# Altium PCB 线.pcbdoc
Units mil, origin at the board's own origin, x right, y up, seen from the top; angles counter-clockwise.
Board outline 1529 x 3542.1 mil, 2 copper layers (Top Layer, Bottom Layer); 6 components, 5 nets, 6 pads, 0 vias.
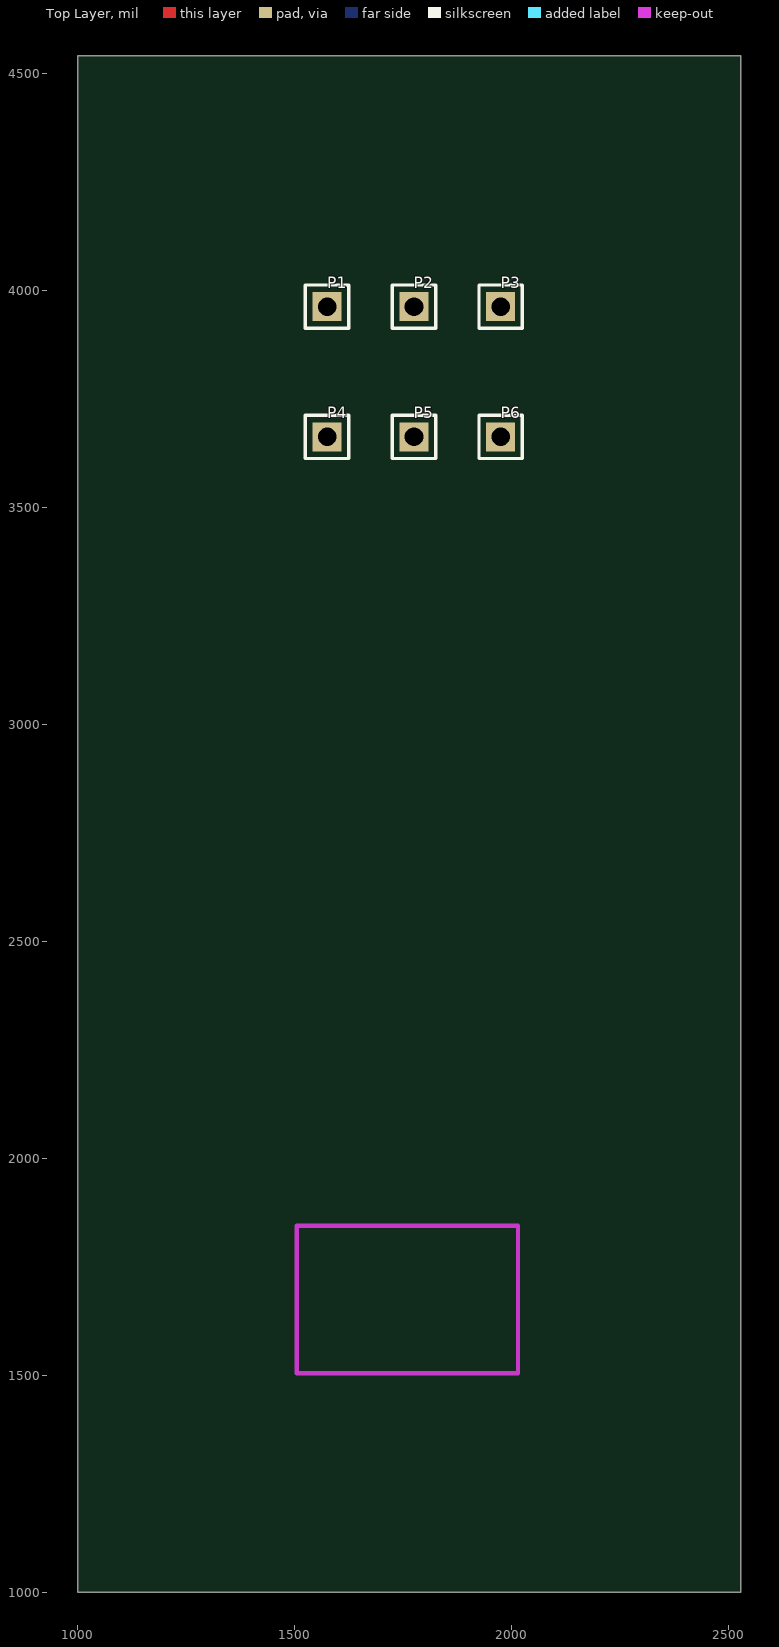
[diagram p0: Top Layer view]
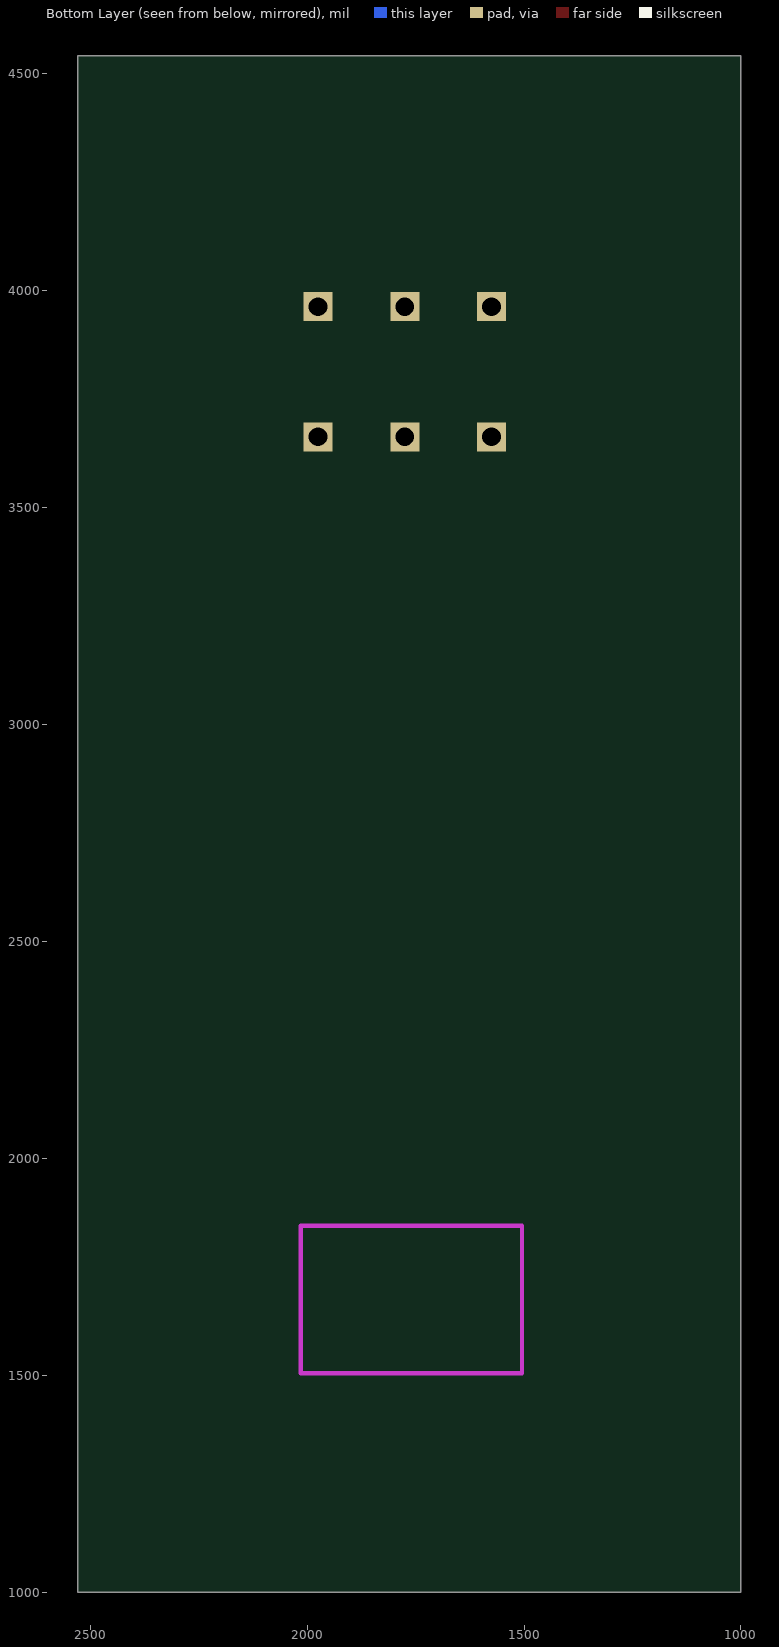
[diagram p1: Bottom Layer view, seen from below]

## Layer stack, top to bottom
Top Solder: solder mask 0.4, Solder Resist, Dk 3.5
Top Layer: signal copper 1.4
Dielectric1: dielectric 12.6, FR-4, Dk 4.8
Bottom Layer: signal copper 1.4
Bottom Solder: solder mask 0.4, Solder Resist, Dk 3.5

## Board outline
2529,1000 1000,1000 1000,4542.1 2529,4542.1

## Design rules (kind name [scope] priority, off if disabled: settings)
Clearance [All] p1: gap=10 ignorepadtopadclearanceinfootprint=FALSE except(0: Arc-Hole Track-Hole SMDPad-Hole THPad-Hole Via-Hole Fill-Hole Poly-Hole Region-Hole Text-Hole)
PolygonConnect [All] p1: connectstyle=Relief reliefconductorwidth=10 reliefentries=4 polygonreliefangle="90 Angle" airgapwidth=10
RoutingVias [All] p1: holewidth=28 width=50 viastyle="Through Hole" minholewidth=28 minwidth=50 maxholewidth=28 maxwidth=50
SolderMaskExpansion [All] p1: expansion=4
Width [All] p1: maxlimit=10 minlimit=10 preferedwidth=10
30 further rules are at their usual default settings.

## Components (designator, comment, footprint, x,y, rotation, side; value= is the part's Value field where it differs from the comment)
P1 "Header-Male-2.54_1x1" HDR-TH_1P-P2.54-V-M 1575,3963.6 r0 top
P2 "Header-Male-2.54_1x1" HDR-TH_1P-P2.54-V-M 1775,3963.6 r0 top
P3 "Header-Male-2.54_1x1" HDR-TH_1P-P2.54-V-M 1975,3963.6 r0 top
P4 "Header-Male-2.54_1x1" HDR-TH_1P-P2.54-V-M 1575,3663.6 r0 top
P5 "Header-Male-2.54_1x1" HDR-TH_1P-P2.54-V-M 1775,3663.6 r0 top
P6 "Header-Male-2.54_1x1" HDR-TH_1P-P2.54-V-M 1975,3663.6 r0 top

## Footprints (in the part's own frame and the unit in brackets; to place one, negate y for a bottom-side part, rotate by r counter-clockwise, add the part's x,y. Pads: shape width x height; smd on the part's side, far side on the other; paste and mask are expansions set on the pad)
HDR-TH_1P-P2.54-V-M [mil]
  rect 66.93x66.93 hole 43.31: 1(0,0)
  silkscreen extent -50,-50 50,50

## Nets (pads, with @x,y where several pads share a name; then routed paths per layer and width w, separated by ;. In a path a pad name is that pad's centre, name@x,y a point inside that pad or via, vN(x,y) a via of type N, cw(c..) or ccw(c..) an arc to the next point about the centre after c; other vN are vias at no path point)
GND: P1.1 P6.1
PB0: P2.1
PB1: P3.1
PB2: P4.1
PB3: P5.1

## Silkscreen, mask and mechanical layers (free items; w line width, h text height)
Document:
  lines w0.1: 1763.5,2770.05 1765.5,2772.05